# Altium PCB pcb.PcbDoc
Units mil, origin at the board's own origin, x right, y up, seen from the top; angles counter-clockwise.
Board outline 866.14 x 3937.01 mil, 2 copper layers (Top Layer, Bottom Layer); 63 components, 39 nets, 188 pads, 37 vias.
Unrouted connection lines stored in the file: 74.
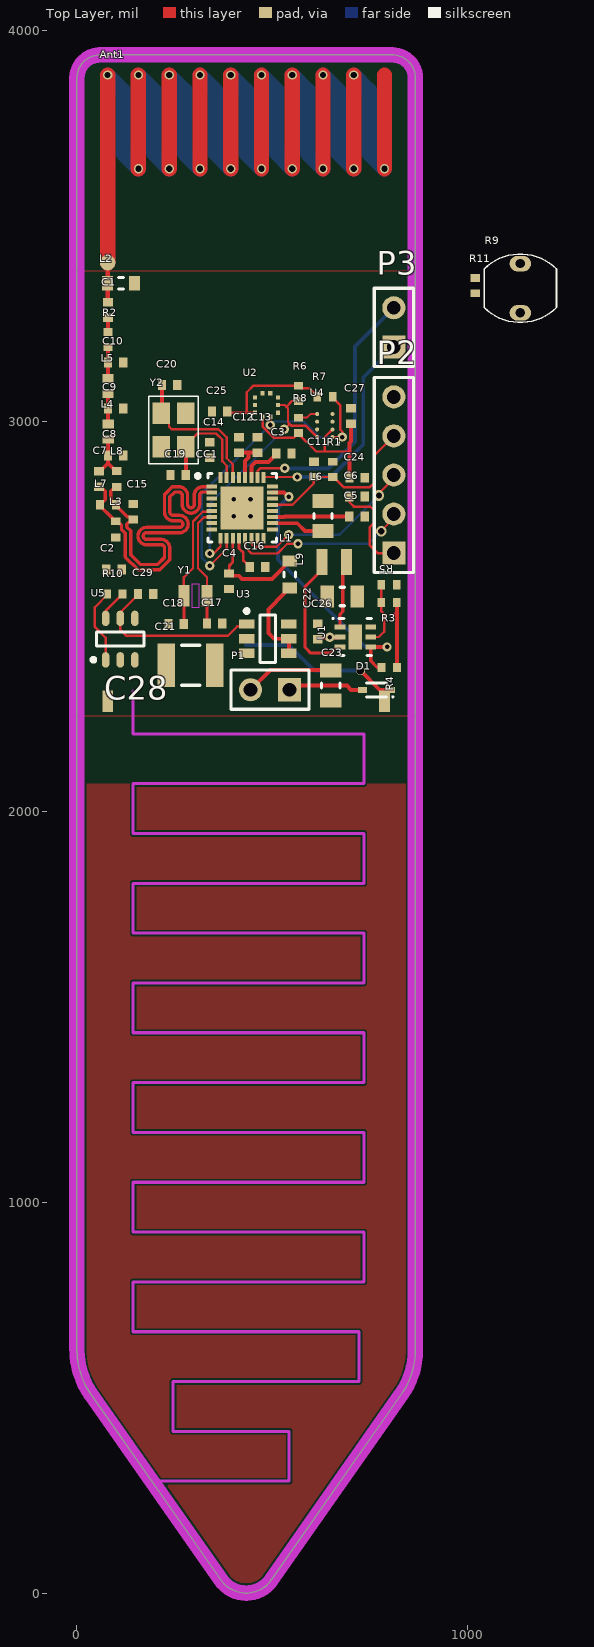
[diagram p0: Top Layer view]
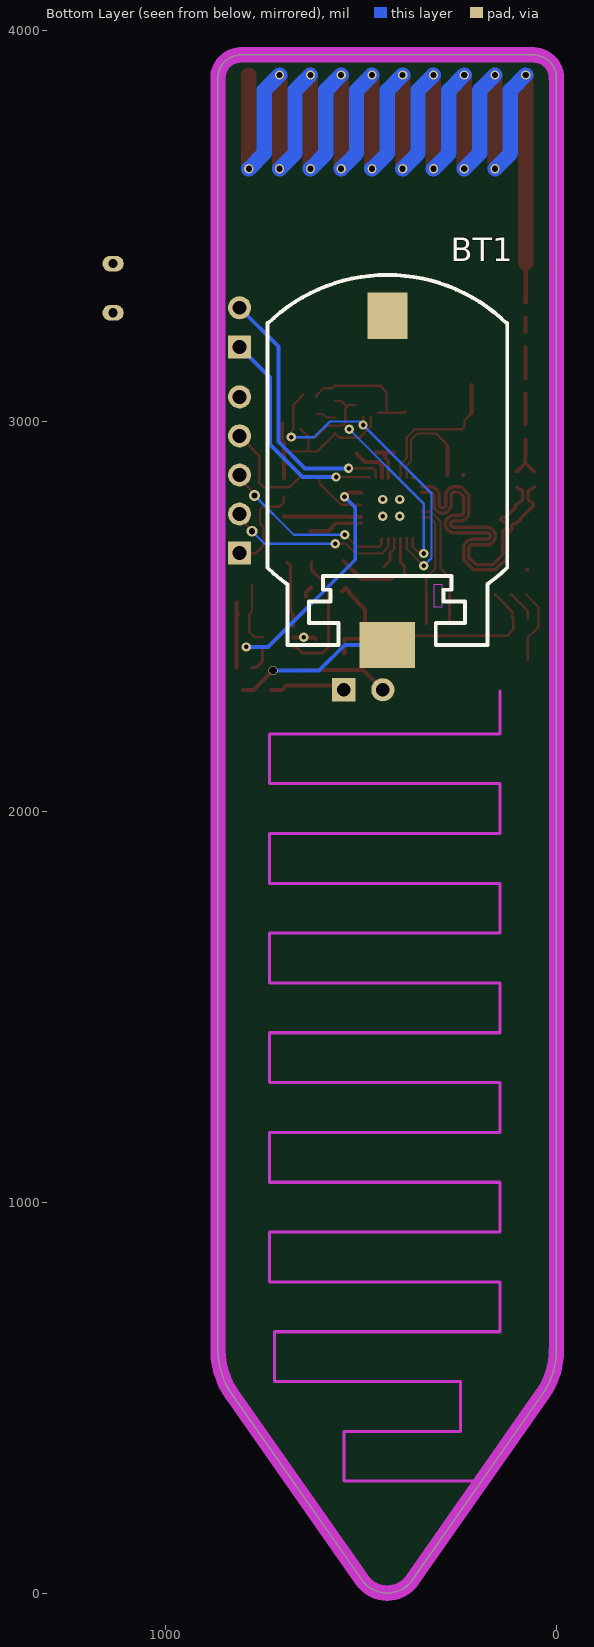
[diagram p1: Bottom Layer view, seen from below]
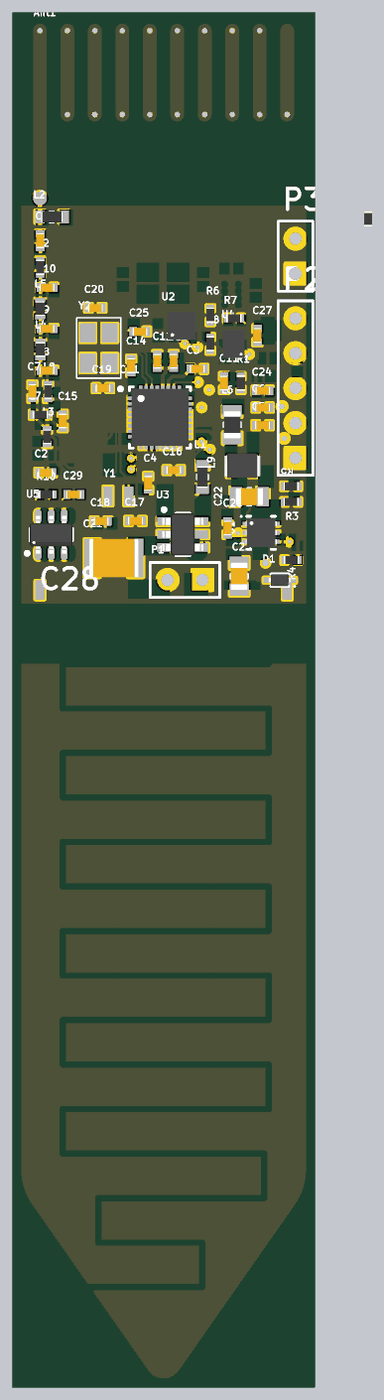
[diagram p2: 3D render of the assembled board from above, using the file's embedded part models]

## Layer stack, top to bottom
Top Solder: solder mask 0.4, Solder Resist, Dk 3.5
Top Layer: signal copper 1.4
Dielectric 1: dielectric 12.6, FR-4, Dk 4.8
Bottom Layer: signal copper 1.4
Bottom Solder: solder mask 0.4, Solder Resist, Dk 3.5

## Board outline
35.85,509.36 cw(c197.1,622.27) 0.25,622.27 0.25,3878.2 cw(c59.31,3878.2) 59.31,3937.26 807.34,3937.26 cw(c807.34,3878.2) 866.39,3878.2 866.39,622.27 cw(c669.54,622.27) 830.79,509.36 497.82,33.83 cw(c433.32,78.99) 368.82,33.83

## Design rules (kind name [scope] priority, off if disabled: settings)
Clearance [All] p1: gap=5 ignorepadtopadclearanceinfootprint=FALSE
DiffPairsRouting [All] p1: maxlimit=5 minlimit=5 mostfreqgap=5 toplayer_minwidth=8.58 toplayer_maxwidth=8.58 toplayer_prefwidth=8.58 bottomlayer_minwidth=8.58 bottomlayer_maxwidth=8.58 bottomlayer_prefwidth=8.58 maxuncoupledlength=500
Height Height_1 [InComponent('U2')] p1: minheight=0 maxheight=3937.01 prefheight=500
Height [All] p2: minheight=0 maxheight=1000 prefheight=500
HoleSize [All] p1: absolutevalues=TRUE maxlimit=100 minlimit=11.81 maxpercent=80.000 minpercent=20.000
PlaneClearance [All] p1: clearance=5
PlaneConnect [All] p1: planeconnectstyle=Direct reliefexpansion=20 reliefentries=4 reliefconductorwidth=10 reliefairgap=10
PolygonConnect [All] p1: connectstyle=Relief reliefconductorwidth=10 reliefentries=4 polygonreliefangle="90 Angle" airgapwidth=10
RoutingVias [All] p1: holewidth=15.75 width=27.56 viastyle="Through Hole" minholewidth=11.81 minwidth=23.62 maxholewidth=19.68 maxwidth=31.5
SolderMaskExpansion [All] p1: expansion=5
Width Width_50ohm [InNet('NetAnt1_1')] p1: maxlimit=39.37 minlimit=11.55 preferedwidth=11.55 minimp=50.000000 maximp=50.000000 favimp=50.000000
Width [All] p2: maxlimit=10 minlimit=5 preferedwidth=6 minimp=50.000000 maximp=50.000000 favimp=50.000000
25 further rules are at their usual default settings.

## Classes and differential pairs
differential pair RF: +RF_P -RF_N

## Components (designator, comment, footprint, x,y, rotation, side; value= is the part's Value field where it differs from the comment)
Ant1 "Antenna 868 Helix" ANTENNA_868_HELIX 78.74,3405.51 r0 top
BT1 "Battery Coin Cell" S8421-45R 433,2488.19 r180 bottom
C1 "Cap" "0402 (CAP)" 79.53,3284.31 r90 top value=8.2pF
C2 "Cap" "0402 (CAP)" 95,2620 r180 top value=100pF
C3 "Cap" "0402 (CAP)" 529.77,2916.94 r180 top value=100nF
C4 "Cap" "0402 (CAP)" 389,2590 r90 top value=100nF
C5 "Cap" "0402 (CAP)" 717.06,2755.7 r180 top value=22uF
C6 "Cap" "0402 (CAP)" 717.06,2806.54 r180 top value=100nF
C7 "Cap" "0402 (CAP)" 57,2852 r90 top value=3.6pF
C8 "Cap" "0402 (CAP)" 99.21,2912.04 r0 top value=2.7pF
C9 "Cap" "0402 (CAP)" 99.21,3032.57 r0 top value=6.2pF
C10 "Cap" "0402 (CAP)" 99.21,3150 r0 top value=3pF
C11 "Cap" "0402 (CAP)" 606.46,2876.58 r90 top value=100nF
C12 "Cap" "0402 (CAP)" 415,2939 r270 top value=22uF
C13 "Cap" "0402 (CAP)" 462,2939 r270 top value=100nF
C14 "Cap" "0402 (CAP)" 340,2926 r270 top value=100nF
C15 "Cap" "0402 (CAP)" 144.13,2767.93 r90 top value=3.6pF
C16 "Cap" "0402 (CAP)" 462.21,2626.94 r180 top value=1uF
C17 "Cap" "0402 (CAP)" 352.64,2481.62 r180 top value=12pF
C18 "Cap" "0402 (CAP)" 254.21,2480.32 r0 top value=12pF
C19 "DNM" "0402 (CAP)" 259.3,2862.04 r0 top value=12pF
C20 "DNM" "0402 (CAP)" 237.49,3092.04 r180 top value=12pF
C21 "GRM32EC70J107ME15L" "1210 (CAP)" 291,2375 r0 top value=100uF
C22 "Cap" "0805 (CAP)" 679,2551 r180 top value=22uF
C23 "Cap" "0805 (CAP)" 649.98,2323 r90 top value=10uF
C24 "Cap" "0402 (CAP)" 717.39,2854.84 r180 top value=100nF
C25 "Cap" "0402 (CAP)" 365.49,3024.1 r0 top value=100nF
C26 "Cap" "0402 (CAP)" 616.64,2461.53 r270 top value=1uF
C27 "Cap" "0402 (CAP)" 702,3013 r270 top value=100nF
C28 "Chumidity" SOIL_CAP 433.07,669.29 r0 top value=1pF
C29 "Cap" "0402 (CAP)" 176,2557.29 r180 top value=100nF
CC1 "CC1310F32RSMR" CC1310F32RSMR 422.84,2777.92 r0 top
D1 "RB751S40T5G" SOD-523 766.43,2312 r180 top
L1 "BLM18HE152SN1D" "0603 (IND)" 544.77,2607.25 r90 top value="1500 Ohm"
L2 "Inductor" "0603 (IND)" 112.99,3353 r0 top value=68nH
L3 "Inductor" "0402 (IND)" 99.44,2722.8 r270 top value=7.5nH
L4 "Inductor" LQW15AN6N8G00D 80,2972.71 r270 top value=6.8nH
L5 "Inductor" LQW15AN6N8G00D 79.53,3089.71 r270 top value=6.8nH
L6 "MLZ2012N6R8LT000" "0805 (IND)" 630,2757 r90 top value=6.8uH
L7 "Inductor" "0402 (IND)" 79.53,2785.8 r0 top value=27nH
L8 "Inductor" "0402 (IND)" 102,2852 r270 top value=7.5nH
L9 "Inductor" SRN2009T 658.84,2639.41 r0 top value=3.3uH
P1 "Header 2" HDR1X2 544.49,2312.41 r180 top
P2 "Header 5" HDR1X5 811.18,2662.04 r90 top
P3 "Header 2" HDR1X2 811.18,3190 r90 top
R1 "Res1" "0402 (RES)" 654.77,2876.58 r90 top value=4.7K
R2 "DNM" "0402 (RES)" 79.53,3208.32 r270 top value=0
R3 "DNM" "0402 (RES)" 799,2536 r180 top value=0
R4 "Res1" "0402 (RES)" 799.47,2369.41 r180 top value=10K
R5 "DNM" "0402 (RES)" 799,2581 r0 top value=0
R6 "Res1" "0402 (RES)" 567.29,3071.02 r90 top value=4.7K
R7 "Res1" "0402 (RES)" 635,3062.04 r180 top value=4.7K
R8 "Res1" "0402 (RES)" 567.29,2988.99 r90 top value=4.7K
R9 "200K - 10K" Photoresistor 1135,3340 r90 top
R10 "Rcharge" "0402 (RES)" 97.26,2557.29 r0 top value=1k
R11 "Res1" "0402 (RES)" 1019.32,3346.65 r90 top value=4.7K
U1 "TPS61291" TPS61291 712.84,2447.41 r0 top
U2 "BMP388, Pressure sensor" BMP388 485.11,3041 r180 top
U3 "TPS22860" SOT23-5 488.43,2442.92 r0 top
U4 "HDC1010, Humidity, Temp" HDC1010 634.57,2988.55 r180 top
U5 "74LVC2G14, Inverting Schmitt Trigger" 74LVC2G14 111,2442 r90 top
Y1 "32.768 kHz" "FC-12M 32.7680KA-A3" 303.43,2552.92 r180 top
Y2 "TSX-3225 24.0000MF20G-AC3" "TSX-3225 24.0000MF20G-AC3" 247.49,2977.04 r90 top

## Footprints (in the part's own frame and the unit in brackets; to place one, negate y for a bottom-side part, rotate by r counter-clockwise, add the part's x,y. Pads: shape width x height; smd on the part's side, far side on the other; paste and mask are expansions set on the pad)
74LVC2G14 [mm] "TSOP, 6-Leads, Body 2,90x1,50mm, Pitch 0,95mm, IPC Medium Density"
  oval 1x0.5 smd: 1(-1.35,0.95) 2(-1.35,0) 3(-1.35,-0.95) 4(1.35,-0.95) 5(1.35,0) 6(1.35,0.95)
  silkscreen extent -1.47,-1.55 0.45,1.87, body extent -1.38,-1.55 1.38,1.55, height 1.1
"0402 (CAP)" [mm] "Chip Capacitor, 2-Leads, Body 1,60x0,80mm, IPC Medium Density"
  rect 0.54x0.64 smd: 1(-0.5,0) 2(0.5,0)
  body extent -0.55,-0.3 0.55,0.3, height 0.4
"0402 (IND)" [mm] "Chip Inductor, 2-Leads, Body 1,00x0,50mm, IPC Medium Density"
  rect 0.51x0.64 smd: 1(-0.525,0) 2(0.525,0)
  body extent -0.55,-0.3 0.55,0.3, height 0.4
"0402 (RES)" [mm] "Chip Resistor, 2-Leads, Body 1,00x0,50mm, IPC Medium Density"
  rect 0.5x0.6 smd: 1(-0.5,0) 2(0.5,0)
  body extent -0.55,-0.3 0.55,0.3, height 0.4
"0603 (IND)" [mm]
  rect 0.72x0.94 smd: 1(-0.87,0) 2(0.87,0)
  silkscreen extent -0.15,-0.37 0.15,0.37, body extent -0.8,-0.4 0.8,0.4, height 0.6
"0805 (CAP)" [mm] "Chip Capacitor, 2-Leads, Body 2,00x1,25mm, IPC Medium Density"
  rect 0.9x1.4 smd: 1(-0.975,0) 2(0.975,0)
  silkscreen extent -0.15,-0.6 0.15,0.6, body extent -1,-0.63 1,0.63, height 0.6
"0805 (IND)" [mm] "Chip Inductor, 2-Leads, Body 2,00x1,25mm, IPC Medium Density"
  rect 0.9x1.39 smd: 1(-0.98,0) 2(0.98,0)
  silkscreen extent -0.15,-0.6 0.15,0.6, body extent -1,-0.63 1,0.63, height 0.6
"1210 (CAP)" [mm] "Chip Capacitor, 2-Leads, Body 3,20x2,50mm, IPC Medium Density"
  rect 1.15x2.8 smd: 1(-1.575,0) 2(1.575,0)
  silkscreen extent -0.6,-1.3 0.6,1.3, body extent -1.8,-1.4 1.8,1.4, height 2.8
ANTENNA_868_HELIX [mm]
  round 1 smd: 1(0,0)
  Top Layer lines w1: 0,0 0,12.2 ; 2,6.1 2,12.2 ; 4,6.1 4,12.2 ; 6,6.1 6,12.2 ; 8,6.1 8,12.2 ; 10,6.1 10,12.2 ; 12,6.1 12,12.2 ; 14,6.1 14,12.2 ; 16,6.1 16,12.2 ; 18,6.1 18,12.2
  Bottom Layer lines w1: 0,12.2 1,11.2 1,7.1 2,6.1 ; 2,12.2 3,11.2 3,7.1 4,6.1 ; 4,12.2 5,11.2 5,7.1 6,6.1 ; 6,12.2 7,11.2 7,7.1 8,6.1 ; 8,12.2 9,11.2 9,7.1 10,6.1 ; 10,12.2 11,11.2 11,7.1 12,6.1 ; 12,12.2 13,11.2 13,7.1 14,6.1 ; 14,12.2 15,11.2 15,7.1 16,6.1 ; 16,12.2 17,11.2 17,7.1 18,6.1
BMP388 [mm] "LGA, 10-Leads, Body 2,00x2,00mmx0,80mm, Pitch 0,50mm"
  rect 0.275x0.275 smd: 1(0.25,0.762) 2(-0.25,0.762) 3(-0.75,0.5) 4(-0.75,0) 5(-0.75,-0.5) 6(-0.25,-0.763) 7(0.25,-0.763) 8(0.75,-0.5) 9(0.75,0) 10(0.75,0.5)
  body extent -1.02,-1.03 1.65,1.02, height 30
CC1310F32RSMR [mm] "QFN, 32-Leads, Body 4,00x4,00mm, Pitch 0,40mm, Thermal Pad 2,80x2,80mm, IPC Medium Density"
  rect 0.7x0.26 smd: 1(-1.975,1.4) 2(-1.975,1) 3(-1.975,0.6) 4(-1.975,0.2) 5(-1.975,-0.2) 6(-1.975,-0.6) 7(-1.975,-1) 8(-1.975,-1.4) 17(1.975,-1.4) 18(1.975,-1) 19(1.975,-0.6) 20(1.975,-0.2) 21(1.975,0.2) 22(1.975,0.6) 23(1.975,1) 24(1.975,1.4)
  rect 0.26x0.7 smd: 9(-1.4,-1.975) 10(-1,-1.975) 11(-0.6,-1.975) 12(-0.2,-1.975) 13(0.2,-1.975) 14(0.6,-1.975) 15(1,-1.975) 16(1.4,-1.975) 25(1.4,1.975) 26(1,1.975) 27(0.6,1.975) 28(0.2,1.975) 29(-0.2,1.975) 30(-0.6,1.975) 31(-1,1.975) 32(-1.4,1.975)
  rect 2.8x2.8 smd: 33(0,0)
  silkscreen extent -3,-2.22 2.22,2.22, body extent -2.08,-2.08 2.08,2.08, height 1
"FC-12M 32.7680KA-A3" [mm]
  rect 0.7x1.4 smd: 1(-0.75,0) 2(0.75,0)
  Keep-Out Layer region: -0.254,-0.762 0.254,-0.762 0.254,0.762 -0.254,0.762
HDC1010 [mm] "BGA, 8-Leads, Body 1,59x2,04mmx0,68mm, Pitch 0,50mm"
  round 0.26 smd: A1(-0.5,0.75) A2(0.5,0.75) B1(-0.5,0.25) B2(0.5,0.25) C1(-0.5,-0.25) C2(0.5,-0.25) D1(-0.5,-0.75) D2(0.5,-0.75)
  silkscreen extent -0.95,1.08 -0.85,1.17, body extent -0.79,-1.02 0.79,1.02, height 0.67
HDR1X2 [mm] "Connector; Header; 2 Position"
  rect 1.5x1.5 hole 0.9: 1(0,0)
  round 1.5 hole 0.9: 2(2.54,0)
  silkscreen extent -1.27,-1.27 3.81,1.27
HDR1X5 [mm] "Connector; Header; 5 Position"
  rect 1.5x1.5 hole 0.9: 1(0,0)
  round 1.5 hole 0.9: 2(2.54,0) 3(5.08,0) 4(7.62,0) 5(10.16,0)
  silkscreen extent -1.27,-1.27 11.43,1.27
LQW15AN6N8G00D [mm] "Chip Inductor, 2-Leads, Body 1,00x0,60mm, IPC Medium Density"
  rect 0.58x0.74 smd: 1(-0.49,0) 2(0.49,0)
  body extent -0.55,-0.35 0.55,0.35, height 0.5
Photoresistor [mm]
  oval 1x1.4 hole 0.6: 1(-1.6,0) 2(1.6,0)
  silkscreen extent -2.22,-2.35 2.22,2.35
S8421-45R [mm]
  rect 3.6x3 smd: 1(0,-1.556)
  rect 2.6x3 smd: 2(0,19.844)
  silkscreen extent -7.8,-1.56 7.8,22.5
SOD-523 [mm] "Molded Diode, 2-Leads, Body 1,20x0,80mm, IPC Medium Density"
  rect 0.6x0.4 smd: 1(-0.9,0) 2(0.9,0)
  silkscreen extent -1.12,-0.45 0.65,0.5, body extent -0.87,-0.45 0.87,0.45, height 0.7
SOIL_CAP [mm]
  rect 0.7x1.4 smd: 1(-9,41) 2(9,41)
  Keep-Out Layer lines w0.2: -7.339,41.656 -7.339,38.867 7.661,38.867 7.661,35.628 -7.339,35.628 -7.339,32.389 7.661,32.389 7.661,29.15 -7.339,29.15 -7.339,25.911 7.661,25.911 7.661,22.672 -7.339,22.672 -7.339,19.434 7.661,19.434 7.661,16.195 -7.339,16.195 -7.339,12.956 7.661,12.956 7.661,9.717 -7.339,9.717 -7.339,6.478 7.661,6.478 7.661,3.239 -7.339,3.239 -7.339,0 7.339,0 7.339,-3.239 -4.749,-3.239 -4.749,-6.478 2.803,-6.478 2.803,-9.717 -5.777,-9.717
SOT23-5 [mm] "SOT23, 5-Leads, Body 2,90x2,80mm, Pitch 0,95mm, IPC Medium Density"
  rect 1x0.6 smd: 1(-1.375,0.95) 2(-1.375,0) 3(-1.375,-0.95) 4(1.375,-0.95) 5(1.375,0) 6(1.375,0.95)
  silkscreen extent -1.5,-1.55 0.5,1.92, body extent -1.5,-1.53 1.5,1.53, height 1.45
SRN2009T [mm] "Molded Inductor, 2-Leads, Body 2,00x1,60mm, IPC Medium Density"
  rect 0.7x1.7 smd: 1(-0.8,0) 2(0.8,0)
  body extent -1.32,-0.9 1.32,0.9, height 0.95
TPS61291 [mm] "SON, 6-Leads, Body 2,00x2,00mm, Pitch 0,65mm, Thermal Pad 1,60x0,89mm, IPC Medium Density"
  rect 0.7x0.3 smd: 1(-0.995,0.65) 2(-0.995,0) 3(-0.995,-0.65) 4(0.995,-0.65) 5(0.995,0) 6(0.995,0.65)
  rect 0.89x1.6 smd: 7(0,0)
  silkscreen extent -1.5,-1.2 1.05,1.25, body extent -1.13,-1.05 1.13,1.05, height 0.8
"TSX-3225 24.0000MF20G-AC3" [mm]
  rect 1.4x1.15 smd: 1(-1.1,-0.8) 2(1.1,-0.8) 3(1.1,0.8) 4(-1.1,0.8)
  silkscreen extent -2.2,-1.6 2.2,1.6

## Part data
C1 C2 C3 C4 C5 C6 C7 C8 C9 C10 C11 C12 C13 C14 C15 C16 C17 C18 C22 C23 C24 C25 C26 C27 C29: "Capacitor", LatestRevisionDate=17-Jul-2002, LatestRevisionNote="Re-released for DXP Platform.", PackageDescription="Radial Cap, Thru-Hole; 2 Leads; 0.3 in Pin Spacing", PackageReference=RAD-0.3, Published=8-Jun-2000, Publisher="Altium Limited"
C19 C20 C21 C28: library part Cap, "Capacitor", LatestRevisionDate=17-Jul-2002, LatestRevisionNote="Re-released for DXP Platform.", PackageDescription="Radial Cap, Thru-Hole; 2 Leads; 0.3 in Pin Spacing", PackageReference=RAD-0.3, Published=8-Jun-2000, Publisher="Altium Limited"
D1: library part "D Schottky", "Schottky Diode", Code_JEDEC=DO-214-AA, LatestRevisionDate=17-Jul-2002, LatestRevisionNote="Re-released for DXP Platform.", PackageDescription="DO-214-AA/SMB; 2 C-Bend Leads; Body 5.3 x 3.6 mm, inc. leads (LxW)", PackageReference=SMB, Published=8-Jun-2000, Publisher="Altium Limited"
L1: library part "Inductor Iron", "Magnetic-Core Inductor", LatestRevisionDate=17-Jul-2002, LatestRevisionNote="Re-released for DXP Platform.", PackageDescription="Axial Device, Thru-Hole; 2 Leads; 0.9 in Pin Spacing", PackageReference=AXIAL-0.9, Published=24-Mar-1999, Publisher="Altium Limited"
L6: library part Inductor, "Inductor", Code_IEC=1005, Code_JEITA=0402, LatestRevisionDate=29-May-2009, LatestRevisionNote="IPC-7351 Footprint Added.", PackageDescription="Chip Inductor", PackageReference=0402-A, Published=8-Jun-2000, Publisher="Altium Limited"
P1 P3: "Header, 2-Pin", LatestRevisionDate=17-Jul-2002, LatestRevisionNote="Re-released for DXP Platform.", Publisher="Altium Limited"
P2: "Header, 5-Pin", LatestRevisionDate=17-Jul-2002, LatestRevisionNote="Re-released for DXP Platform.", Publisher="Altium Limited"
R1 R4 R6 R7 R8 R11: "Resistor", LatestRevisionDate=17-Jul-2002, LatestRevisionNote="Re-released for DXP Platform.", PackageDescription="Axial Device, Thru-Hole; 2 Leads; 0.3 in Pin Spacing", PackageReference=AXIAL-0.3, Published=8-Jun-2000, Publisher="Altium Limited"
R2 R3 R5 R10: library part Res1, "Resistor", LatestRevisionDate=17-Jul-2002, LatestRevisionNote="Re-released for DXP Platform.", PackageDescription="Axial Device, Thru-Hole; 2 Leads; 0.3 in Pin Spacing", PackageReference=AXIAL-0.3, Published=8-Jun-2000, Publisher="Altium Limited"
R9: library part "Photo Resistor"
U2: library part BMP388
U4: library part HDC1010
U5: library part 74LVC2G14
Y1: library part XTAL, "Crystal Oscillator", LatestRevisionDate=17-Jul-2002, LatestRevisionNote="Re-released for DXP Platform.", PackageDescription="Crystal, Thru-Hole; 2 Leads; Body 3.1 x 8.2 mm (Dia.xH)", PackageReference=R38, Published=8-Jun-2000, Publisher="Altium Limited"
Y2: library part Crystal
L2 L3 L4 L5 L7 L8 L9: Code_IEC=1005, Code_JEITA=0402, LatestRevisionDate=29-May-2009, LatestRevisionNote="IPC-7351 Footprint Added.", PackageDescription="Chip Inductor", PackageReference=0402-A, Published=8-Jun-2000, Publisher="Altium Limited"

## Via types
v1: diameter 23.62, hole 15.75, Top Layer to Bottom Layer, tented both sides, 18 vias
v2: diameter 23.62, hole 11.81, Top Layer to Bottom Layer, 16 vias
v3: diameter 27.56, hole 15.75, Top Layer to Bottom Layer, 2 vias
v4: diameter 23.62, hole 19.68, Top Layer to Bottom Layer, 1 vias

## Nets (pads, with @x,y where several pads share a name; then routed paths per layer and width w, separated by ;. In a path a pad name is that pad's centre, name@x,y a point inside that pad or via, vN(x,y) a via of type N, cw(c..) or ccw(c..) an arc to the next point about the centre after c; other vN are vias at no path point)
BMP_INT: U2.7
DCDC_SW: CC1.18 L6.1 | length 137.4
  Top Layer w10: CC1.18 564.12,2738.55 584,2718.67 L6.1@629.77,2718.67
DRDYn: CC1.16 R8.2 U4.D2 | length 51.5
  Top Layer w5: R8.2 588.38,3008.67 597.78,3018.07 U4.D2
EN_BYP: CC1.23 R4.2 U1.4 | length 703.1
  Top Layer w8: U1.4 752.02,2386.24 768.84,2369.41 R4.2
  Top Layer w10: CC1.23 529.72,2817.29 540.47,2806.54 v2(542.56,2806.54) ; U1.4 793.82,2421.82 v2(794,2422)
  Bottom Layer w10: v2(542.56,2806.54) 515,2778.98 515,2645 738,2422 v2(794,2422)
GND: BT1.2 C2.1 C3.1 C4.1 C5.1 C6.1 C8.2 C9.2 C10.2 C11.2 C12.1 C13.1 C14.1 C15.2 C16.1 C17.1 C18.1 C19.1 C20.1 C21.1 C22.1 C23.1 C24.1 C25.1 C26.1 C27.1 C28.2 C29.1 CC1.3 CC1.7 CC1.17 CC1.20 CC1.29 CC1.33 L2.2 P2.5 R5.2 R11.1 U1.6 U1.7 U2.3 U2.5 U2.8 U2.9 U3.2 U4.B2 U4.C1 U4.D1 U5.2 Y2.2 Y2.4 | length 1.8
  Top Layer w10: C19.1@237.8,2862.04 C19.1
  other v2: 401.18,2756.27 444.49,2756.27 401.18,2799.57 444.49,2799.57
JTAG_TCK: CC1.14 P2.3 | length 466.7
  Top Layer w6: CC1.14 448.58,2698.05 448.58,2683.58 453.77,2678.39 511.39,2678.39 v2(542,2709) ; v3(772.81,2809.33) 772.81,2814.63 811.18,2853 P2.3
  Bottom Layer w6: v2(542,2709) 672.48,2709 v3(772.81,2809.33)
JTAG_TMS: CC1.13 P2.2 | length 458.7
  Top Layer w6: CC1.13 430.89,2699.99 430.89,2677.39 447.28,2661 513.6,2661 538.6,2686 v2(566,2686) ; v3(779,2718) 779,2719.4 811.18,2751.58 P2.2
  Bottom Layer w6: v2(566,2686) 747,2686 v3(779,2718)
NetAnt1_1: Ant1.1 C1.2 L2.1 | length 101.8
  Top Layer w11.55: Ant1.1 L2.1 79.13,3352.61 79.13,3304.39 C1.2
  other v1: 157.48,3645.67 236.22,3645.67 314.96,3645.67 393.7,3645.67 472.44,3645.67 551.18,3645.67 629.92,3645.67 708.66,3645.67 787.4,3645.67 78.74,3885.83 157.48,3885.83 236.22,3885.83 314.96,3885.83 393.7,3885.83 472.44,3885.83 551.18,3885.83 629.92,3885.83 708.66,3885.83
NetBT1_1: BT1.1 D1.1 | length 416.5
  Top Layer w10: v4(725.57,2361.39) 725.67,2361.39 775.06,2312 D1.1
  Bottom Layer w10: BT1.1 542,2426.93 607.54,2361.39 v4(725.57,2361.39)
NetC1_1: C1.1 R2.1 | length 36.6
  Top Layer w10: R2.1 C1.1
NetC2_2: C2.2 CC1.4 L3.2 | length 0.7
  Top Layer w10: C2.2@74.82,2620.49 C2.2
NetC7_2: C7.2 C8.1 L4.2 L8.1 | length 123.2
  Top Layer w10: C7.2 58.97,2871.69 79.39,2892.11 80,2892.11 ; L4.2 79.76,2953.18 79.76,2912.27 C8.1 80,2911.57 80,2892.11 ; L8.1 99.44,2872.67 80,2892.11
NetC9_1: C9.1 L4.1 L5.2 | length 78.6
  Top Layer w10: L5.2 C9.1 79.76,3032.33 79.76,2992.24 L4.1
NetC10_1: C10.1 L5.1 R2.2 | length 79.6
  Top Layer w10: L5.1 C10.1 R2.2
NetC16_2: C16.2 CC1.12 | length 84.6
  Top Layer w7: CC1.12 414.96,2673.98 426,2662.95 426,2643.46 C16.2
NetC17_2: C17.2 CC1.6 Y1.1 | length 308
  Top Layer w6: Y1.1 332.95,2600.47 310,2623.43 310,2738.44 325.86,2754.3 CC1.6
  Top Layer w7: C17.2 Y1.1
NetC18_2: C18.2 CC1.5 Y1.2 | length 331.5
  Top Layer w6: Y1.2 273.9,2600.47 297,2623.57 297,2743 321.93,2767.93 342.96,2767.93 CC1.5
  Top Layer w7: C18.2 Y1.2
NetC19_2: C19.2 CC1.31 Y2.1 | length 290
  Top Layer w6: Y2.1 278.99,2938.65 308.62,2968.29 356.25,2968.29 372.32,2952.21 372.32,2897 383.47,2885.86 CC1.31
  Top Layer w10: C19.2 Y2.1
NetC20_2: C20.2 CC1.30 Y2.3 | length 384.4
  Top Layer w6: Y2.3 235.63,3000.71 235.63,2986.08 242.42,2979.29 362.47,2979.29 383.47,2958.29 383.47,2905.08 399.21,2889.33 CC1.30
  Top Layer w10: Y2.3 217.8,3020.35 C20.2
NetC28_1: C28.1 R10.1 U5.1 | length 193
  Top Layer w6: U5.1 73.6,2445.4 46,2473 46,2523.75 77.58,2555.32 R10.1
NetCC1_24: CC1.24 R9.2 R11.2
NetD1_2: D1.2 P1.1 | length 195.5
  Top Layer w10: P1.1 555.08,2323 691,2323 702,2312 D1.2
NetL9_2: L9.2 U1.1 | length 173.3
  Top Layer w8: U1.1 673.67,2505.73 680.56,2512.62 680.56,2629.63 L9.2
NetR3_2: R3.2 R5.1 U1.5 | length 162.9
  Top Layer w6: U1.5 772.81,2447.41 786.4,2461 786.4,2505.73 779.31,2512.82 R3.2 R5.1
PWR_ON: CC1.15 U3.6
RESET_N: C11.1 CC1.21 P2.4 R1.1 | length 455.6
  Top Layer w6: CC1.21 551.76,2785.8 606.46,2840.5 C11.1 R1.1 656.73,2856.9 682.63,2831 750,2831 761.18,2842.18 761.18,2912.04 P2.4
RF_N: C7.1 CC1.2 L3.1 L7.1 | length 905.4
  Top Layer w8.58: C7.1 63.34,2825.98 67.68,2825.98 72.71,2820.95 72.71,2806.38 ; 72.74,2806.35 72.74,2799.13 67.71,2794.1 64.61,2794.1 58.86,2788.35 L7.1 58.86,2783.24 91.13,2750.96 91.13,2749.22 96.88,2743.47 L3.1 L3.1@105.19,2737.72 ; L3.1@111.02,2736.67 114.1,2733.59 114.1,2723.25 124.07,2713.28 124.07,2651.97 156.58,2619.45 212.02,2619.45 237.81,2645.24 237.81,2674.99 ccw(c215.65,2674.99) 215.65,2697.15 178.38,2697.15 cw(c178.38,2705.73) 178.38,2714.31 262.55,2714.31 ccw(c262.55,2736.47) 284.71,2736.47 ccw(c262.55,2736.47) 262.55,2758.63 246.38,2758.63 cw(c246.38,2767.21) 237.8,2767.21 237.81,2806.21 249.97,2818.38 261.12,2818.38 cw(c261.12,2809.8) 269.7,2809.8 269.7,2786.58 ccw(c291.86,2786.58) 314.02,2786.58 314.02,2809.8 cw(c322.6,2809.8) 322.6,2818.38 333.68,2818.38 333.93,2818.12 344.25,2818.12 CC1.2
RF_P: C15.1 CC1.1 L7.2 L8.2 | length 894.1
  Top Layer w8.58: 86.32,2811.97 86.32,2799.13 91.34,2794.1 94.45,2794.1 104.17,2784.38 104.17,2779.26 128.85,2754.58 137.79,2754.58 C15.1 137.79,2741.9 133.6,2741.9 127.68,2735.98 127.68,2728.87 137.65,2718.91 137.65,2657.59 162.21,2633.03 206.39,2633.03 224.22,2650.86 224.22,2674.99 ccw(c215.65,2674.99) 215.65,2683.57 178.38,2683.57 cw(c178.38,2705.73) 178.38,2727.89 262.55,2727.89 ccw(c262.55,2736.47) 271.13,2736.47 ccw(c262.55,2736.47) 262.55,2745.05 246.38,2745.05 cw(c246.38,2767.21) 224.22,2767.21 224.22,2811.84 244.34,2831.96 261.12,2831.96 cw(c261.12,2809.8) 283.28,2809.8 283.28,2786.58 ccw(c291.86,2786.58) 300.44,2786.58 300.44,2809.8 cw(c322.6,2809.8) 322.6,2831.96 333.68,2831.96 333.93,2832.21 344.25,2832.21 CC1.1 ; 86.29,2812 86.29,2820.56 91.32,2825.58 96.25,2825.58 L8.2
SCL: CC1.10 R7.1 U2.2 U4.A1 | length 903.6
  Top Layer w6: v2(340,2629.63) 383.47,2673.1 CC1.10 ; v2(495,2990) U2.2 ; R7.1@647.84,3068.88 R7.1 654.68,3060.07 673.67,3041.08 673.67,2978.43 679,2973.11 v2(679,2959) U4.A1 U4.A1@653.12,2959.02
  Bottom Layer w6: v2(340,2629.63) 320,2649.63 320,2815 v2(495,2990) 504,2999 580,2999 620,2959 v2(679,2959)
SDA: CC1.9 R6.1 U2.4 U4.A2 | length 665.6
  Top Layer w6: v2(340,2661) 342.24,2663.24 352.24,2663.24 367.72,2678.72 CC1.9 ; U2.4 532,3041 536.22,3036.78 ; v2(530.6,2979.29) 531.28,2979.29 544.71,2992.72 ; R6.1 550.77,3051.33 536.22,3036.78 ; U4.A2 585.45,2988.45 548.99,2988.45 544.71,2992.72 ; 536.22,3036.78 540.43,3032.57 540.43,2997 544.71,2992.72
  Bottom Layer w6: v2(340,2661) 340,2788.69 v2(530.6,2979.29)
SOIL_HUMIDITY: CC1.22 R10.2 U5.6 | length 80.1
  Top Layer w6: U5.6 73.6,2513.94 R10.2
UART_RX: CC1.26 P3.2 | length 681.4
  Top Layer w6: CC1.26 462.21,2872.21 469,2879 v2(532,2879)
  Bottom Layer w10: v2(532,2879) 644,2879 712,2947 712,3190.82 P3.2
UART_TX: CC1.25 P3.1 | length 572.4
  Top Layer w6: CC1.25 479.18,2856.9 v2(564.12,2856.9)
  Bottom Layer w10: v2(564.12,2856.9) 649.9,2856.9 733,2940 733,3111.82 P3.1
V_switch: C24.2 C25.2 C27.2 C29.2 R6.2 R7.2 R8.1 R9.1 U2.1 U2.10 U3.1 U4.B1 U5.5 | length 1267.9
  Top Layer w6: C29.2 156.32,2555.32 113.62,2512.63 113.62,2497.77 U5.5 111,2466.27 127.05,2450.21 386.21,2450.21 410.73,2474.73 428.7,2474.73 U3.1 ; C25.2@385.17,3026.07 389.92,3021.32 435,3021.32 ; U2.10 435,3021.32 ; U2.1 475.27,2985.89 504.22,2956.94 554.92,2956.94 R8.1@566.3,2968.32 ; R8.1 R8.1@566.3,2968.32 ; R7.2 615.31,3064.01 595.46,3083.86 574.13,3083.86 R6.2 451.78,3090.7 435,3073.92 435,3021.32 ; U4.B1 634.57,2959.02 634.57,2922 ; 697.7,2922 634.57,2922 ; R9.1 R9.1@1135.54,3277.01 ; R8.1@566.3,2968.32 612.62,2922 634.57,2922
  Top Layer w10: C24.2 697.7,2922 697.7,2943.7 702,2948 C27.2
Vbat: C21.2 C23.2 CC1.8 L9.1 P1.2 U1.3 | length 565.9
  Top Layer w8: L9.1 627.35,2619.73 584,2576.38 584,2421 599,2406 649.98,2406 665.8,2421.82 U1.3
  Top Layer w10: P1.2 495.08,2363 648.36,2363 C23.2
VCC: C22.2 C26.2 L1.1 R3.1 R4.1 U1.2 U3.4 U3.5 | length 500.1
  Top Layer w10: 504.34,2442.92 490,2457.27 490,2518.23 531.26,2559.5 531.26,2563.83 540.43,2573 L1.1@549.49,2563.95 ; 507,2442.92 U3.5 U3.4 U3.4@545.22,2408.18 ; C26.2 621.3,2446.51 v2(647.03,2446.51) 672.77,2446.51 U1.2 ; C22.2@627.9,2573.56 640.61,2560.84 C22.2 ; 814.68,2505 814.92,2504.76 ; R4.1@818.92,2369.65 R3.1@818.92,2535.76
VDDIO: U2.6
VDDR: C12.2 C13.2 C14.2 CC1.28 CC1.32 L6.2 | length 115.3
  Top Layer w6: C12.2 C12.2@415.25,2919.57
  Top Layer w10: CC1.32@367.6,2855.8 CC1.32 ; C12.2@415.25,2919.57 438.73,2919.57 ; CC1.28 430.71,2897.62 439.41,2906.31 439.41,2918.89 438.73,2919.57 ; C13.2@462.21,2919.57 438.73,2919.57
VDDS: C3.2 C4.2 C5.2 C6.2 CC1.11 CC1.19 CC1.27 L1.2 P2.1 R1.2 | length 827.5
  Top Layer w6: C6.2 697.7,2806.21 697.7,2792.3 709,2781 751,2781 759,2773 759,2738 750,2729 750,2681.51 769.48,2662.04 P2.1
  Top Layer w7: C4.2 389.92,2610.61 389.92,2629.63 399.21,2638.92 CC1.11
  Top Layer w10: C4.2 394.63,2604.06 414.96,2604.06 423.02,2596 499.26,2596 L1.2 ; CC1.27 446.58,2855.8 446.58,2884.58 457,2895 490.11,2895 510.08,2914.97 C3.2 ; CC1.19 530.6,2754.3 532,2755.7 C5.2
pads on no net: U3.3 U4.C2 U5.3 U5.4

## Polygon pours and split planes (outlines as drawn)
no net on Top Layer "Top Layer-No Net" (solid, shelved, pour order 6): 0,3385 866.39,3385 866.39,2245 0,2245
GND on Top Layer "Top Layer-GND" (solid, pour order 4): 866.39,2071.98 144.13,2071.98 144.13,1944.46 734.69,1944.46 734.69,1816.94 144.13,1816.94 144.13,1689.43 734.69,1689.43 734.69,1561.91 144.13,1561.91 144.13,1434.39 734.69,1434.39 734.69,1306.88 144.13,1306.88 144.13,1179.36 734.69,1179.36 734.69,1051.84 144.13,1051.84 144.13,924.33 734.69,924.33 734.69,796.81 144.13,796.81 144.13,669.29 722.01,669.29 722.01,541.77 246.1,541.77 246.1,414.26 543.43,414.26 543.43,286.74 191.73,286.74 368.82,33.83 433.07,0.25 484.05,18.77 846.6,536.25 866.39,622.27
NetC28_1 on Top Layer "Top Layer-NetC28_1" (solid, pour order 2): 734.69,1944.46 144.13,1944.46 144.13,2071.98 0,2071.98 0,574 205.62,286.74 543.43,286.74 543.43,414.26 246.1,414.26 246.1,541.77 722.01,541.77 722.01,669.29 144.13,669.29 144.13,796.81 734.69,796.81 734.69,924.33 144.13,924.33 144.13,1051.84 734.69,1051.84 734.69,1179.36 144.13,1179.36 144.13,1306.88 734.69,1306.88 734.69,1434.39 144.13,1434.39 144.13,1561.91 734.69,1561.91 734.69,1689.43 144.13,1689.43 144.13,1816.94 734.69,1816.94

## Keep-outs
Keep-Out Layer:
  lines w39.37: 0,624 0,3879.94 ; 0.25,622.27 ccw(c197.1,622.27) 35.85,509.36 368.82,33.83 ccw(c433.32,78.99) 497.82,33.83 830.79,509.36 ccw(c669.54,622.27) 866.39,622.27 866.39,3878.2 ccw(c807.34,3878.2) 807.34,3937.26 ; 0.25,3878.2 cw(c59.31,3878.2) 59.31,3937.26 ; 59.31,3937.26 807.34,3937.26 ; 59.31,3937.26 59.31,3937.26 ; 807.34,3937.26 807.34,3937.26

## Silkscreen, mask and mechanical layers (free items; w line width, h text height)
Mechanical 1:
  the board outline again, w0.5